# EAGLE board nano24rf-topo-thru (EAGLE 6.6.0)
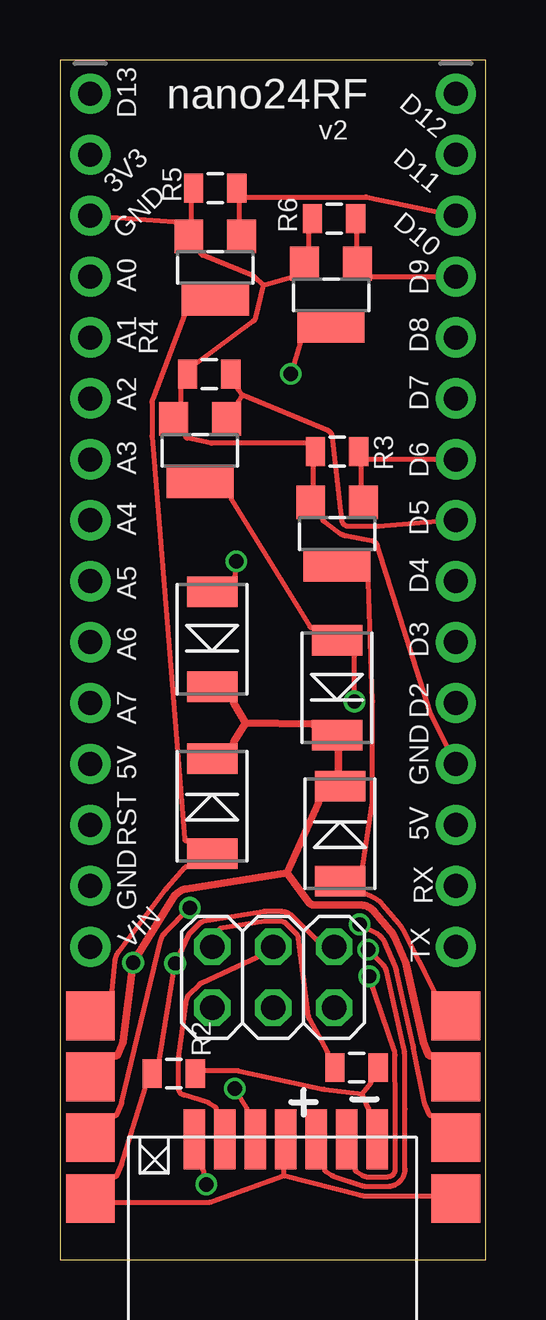
[diagram p0: board, top side]
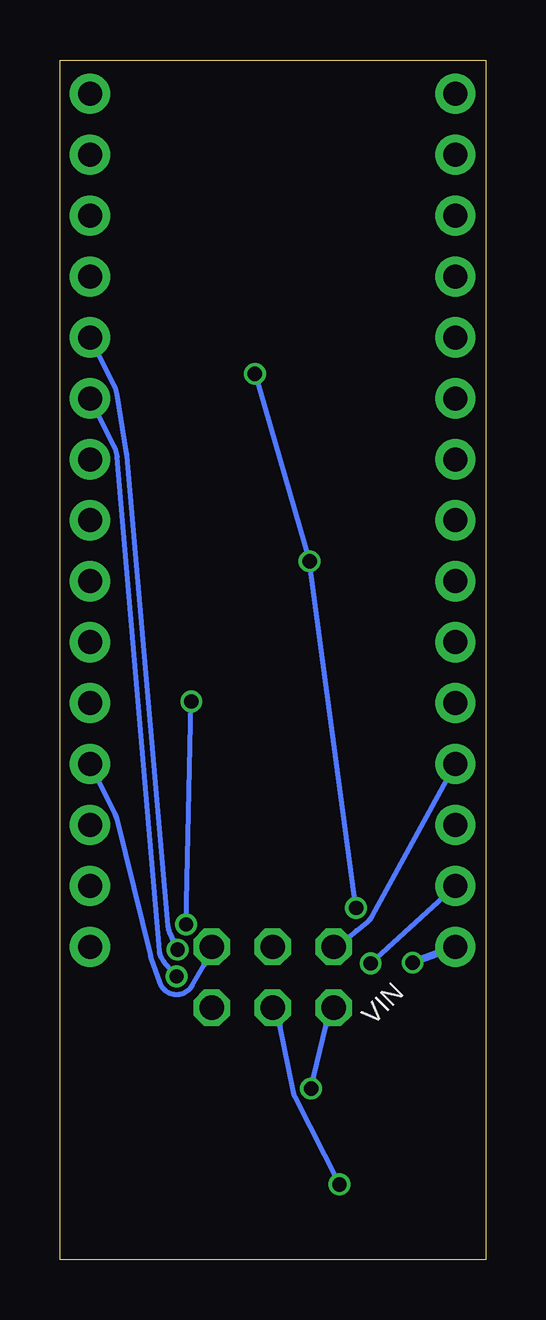
[diagram p1: board, bottom side, seen from below]

Size 17.76 x 50 mm. Coordinates in mm from the lower left corner, seen from the top.
Outline: 0,0 17.76,0 17.76,50 0,50 0,0
Copper layers (1*16): TOP 0.035mm / dielectric 1.5mm / BOTTOM 0.035mm
Design rules "Elecrow_2-layer_eagle_rule": minimum track width 6mil, minimum drill 12mil, track to track 6mil, track to pad 6mil, pad to pad 6mil, via to via 6mil, smd to smd 0mil, copper to edge 10mil, drill to drill 10mil, minimum pad ring 10mil, minimum via ring 6mil, stop-mask expansion 2mil, vias tented up to drill 100mil, thermal gap 10mil
Net classes: 0 default: width 0.178 mm, clearance 0.178 mm; 1 class_VIN: width 0.254 mm, clearance 0.178 mm to class 0, clearance 0.178 mm

## Footprints (pad centres in the part's own frame; a part is rotated, then mirrored left to right if it is on the bottom)
DO-214AC = smd 1.27 x 2.1: 1 -1.98,0; 2 1.98,0
1X15_ROUND_70 = drill 1 pad 1.676: 1 -17.78,0; 2 -15.24,0; 3 -12.7,0; 4 -10.16,0; 5 -7.62,0; 6 -5.08,0; 7 -2.54,0; 8 0,0; 9 2.54,0; 10 5.08,0; 11 7.62,0; 12 10.16,0; 13 12.7,0; 14 15.24,0; 15 17.78,0
2X03 = drill 1.016 pad 1.524 octagon: 1 -2.54,-1.27; 2 -2.54,1.27; 3 0,-1.27; 4 0,1.27; 5 2.54,-1.27; 6 2.54,1.27
SOT23-W = smd 1.2 x 1.4: 1 -1.1,-1.3; 2 1.1,-1.3 | smd 2.8 x 1.4: 3 0,1.3
0805 = smd 0.8 x 1.2: 1 -0.9,0; 2 0.9,0
FATPAD4 = smd 2.032 x 2.032: P$1 -3.81,0; P$2 -1.27,0; P$3 1.27,0; P$4 3.81,0
SMD1,27-2,54 = smd 0.9 x 2.5: 1 1.63,0.1; 2 2.9,0.1; 3 4.17,0.1; 4 5.44,0.1; 5 6.71,0.1; 6 7.98,0.1; 7 9.25,0.1

## Placement (x,y rotation side)
D1  [DO-214AC]  11.68,17.75 270 top
D2  [DO-214AC]  11.56,23.83 90 top
D3  [DO-214AC]  6.35,18.89 270 top
D4  [DO-214AC]  6.35,25.86 90 top
JP1  [1X15_ROUND_70]  1.27,30.81 270 top
JP2  [1X15_ROUND_70]  16.51,30.81 270 top
JP3  [2X03]  8.89,11.76 0 top
Q1  [SOT23-W]  11.56,30.26 180 top
Q2  [SOT23-W]  5.84,33.73 180 top
Q3  [SOT23-W]  6.48,41.35 180 top
Q4  [SOT23-W]  11.3,40.21 180 top
R1  [0805]  12.37,8 0 top
R2  [0805]  4.75,7.75 0 top
R3  [0805]  11.56,33.67 0 top
R4  [0805]  6.22,36.91 0 top
R5  [0805]  6.48,44.66 0 top
R6  [0805]  11.43,43.39 0 top
U$6  [FATPAD4]  1.27,6.35 270 top
U$7  [SMD1,27-2,54]  14.86,5.11 180 top
U$8  [FATPAD4]  16.51,6.35 270 top

## Library data of the parts
D1-D4 = dp_devices
JP1 JP2 = microbuilder
JP3 = pinhead
Q1-Q4 = adafruit
R1-R6 = ATTAMI-V0.00
U$6-U$8 = nano24rf

## Nets
3V3: JP1.2
5V: JP1.12 JP3.2 R1.1
CE: JP2.6 U$7.2
CSN: JP2.5 U$7.3
D3: JP2.10
D5: JP2.8 Q2.1 R4.2
D6: JP2.7 Q1.1 R3.2
D9: JP2.4 Q4.1 R6.2
D10: JP2.3 Q3.1 R5.2
FET01: D1.2 Q1.3 U$8.P$1
FET02: D2.2 Q2.3 U$8.P$3
FET03: D3.2 Q3.3 U$6.P$1
FET04: D4.2 Q4.3 U$6.P$3
GND: JP1.3 JP1.14 JP2.12 JP3.6 Q1.2 Q2.2 Q3.2 Q4.2 R2.1 R3.1 R4.1 R5.1 R6.1 U$6.P$4 U$7.4 U$8.P$4
MISO: JP3.1 U$7.5
MOSI: JP3.4 U$7.6
N$6: R1.2 R2.2 U$7.1
RST: JP3.5
SCK: JP3.3 U$7.7
SCL: JP1.9
SDA: JP1.8
VIN [class_VIN]: D1.1 D2.1 D3.1 D4.1 JP1.15 U$6.P$2 U$8.P$2

## Tracks (layer width: path | path; a pad name or v marks a point on that pad's centre or on a via)
5V
  TOP 0.203: R1.1 11.17,8.5 11.17,8.6 arc29 11.16,8.65 10.4,10.03 arc-21 10.37,10.14 9.95,13.39 arc38 9.87,13.56 9.42,14.01 arc45 9.21,14.1 8.57,14.1 arc9 8.53,14.1 6.68,13.8 arc36 6.67,13.79 6.67,13.69 JP3.2
  BOTTOM 0.203: JP3.2 5.77,13.39 5.7,13.46 5.41,13.69 arc1 5.4,13.7 4.94,14.06 arc-23 4.75,14.29 JP1.12
CE  (via drill 0.6 pad 0.9)
  TOP 0.203: U$7.2 12.31,3.86 12.31,3.76 arc57 12.35,3.68 12.61,3.51 arc33 12.78,3.46 13.68,3.46 arc90 13.98,3.76 13.98,6.26 13.97,8.5 arc2 13.97,8.51 13.97,8.62 arc16 13.95,8.7 v12.89,11.8
  BOTTOM 0.203: v12.89,11.8 13.43,12.43 arc36 13.61,12.86 15.37,33.45 arc-22 15.49,33.87 JP2.6
CSN  (via drill 0.6 pad 0.9)
  TOP 0.203: U$7.3 11.04,3.86 11.04,3.76 arc57 11.08,3.68 11.34,3.51 arc15 11.41,3.47 12.55,3.09 arc19 12.78,3.05 13.68,3.05 arc90 14.39,3.76 14.39,6.26 14.38,8.5 arc5 14.38,8.57 14.37,8.67 arc11 14.34,8.8 arc-4 14.32,8.88 13.63,11.97 arc32 13.43,12.34 v12.85,12.92
  BOTTOM 0.203: v12.85,12.92 13.19,13.66 arc19 13.25,13.9 14.97,33.49 arc-4 14.98,33.6 15.38,36.08 arc-18 15.49,36.41 JP2.5
D5
  TOP 0.203: JP2.8 13.28,30.55 arc-5 13.26,30.55 12.06,30.55 arc-84 11.75,30.82 11.36,34.3 arc61 11.17,34.55 7.65,36.01 arc10 7.6,36.02 | R4.2 7.42,36.41 7.42,36.31 arc35 7.44,36.25 7.6,36.02 | 7.6,36.02 7.46,35.79 arc32 7.44,35.73 7.44,35.63 Q2.1
D6
  TOP 0.203: JP2.7 12.86,33.35 12.76,33.35 R3.2 12.56,33.17 12.56,33.07 12.56,32.26 12.56,32.16 Q1.1
D9
  TOP 0.203: JP2.4 13,40.97 12.9,40.97 Q4.1 12.37,42.11 12.37,42.21 12.37,42.79 12.37,42.89 R6.2
D10
  TOP 0.203: Q3.1 7.48,43.25 7.48,43.35 7.48,44.06 7.48,44.16 R5.2 7.67,44.29 7.78,44.29 12.73,44.29 arc-12 12.79,44.28 JP2.3
FET01
  TOP 0.203: U$8.P$1 15.6,11.07 15.6,11.18 arc27 15.59,11.22 14.35,13.67 arc13 14.13,14 13.46,14.79 arc27 12.99,15.13 12.77,15.23 arc23 12.73,15.23 12.63,15.23 D1.2 12.63,16.3 12.63,16.4 arc-9 12.63,16.42 13.04,19.05 arc9 13.04,19.09 13.04,23.26 arc2 13.04,23.29 12.86,28.25 12.86,28.26 12.86,28.36 Q1.3
FET02  (via drill 0.6 pad 0.9)
  TOP 0.203: Q2.3 7.14,31.84 7.14,31.73 arc32 7.16,31.68 10.42,26.39 arc58 10.51,26.34 10.61,26.34 D2.2 12.28,25.27 12.28,25.17 v12.28,23.26 | U$8.P$3 15.6,5.99 15.49,5.99 arc-66 15.4,6.05 15.21,6.48 arc-12 15.2,6.54 14.75,8.81 arc5 14.72,8.91 arc-4 14.71,8.97 14.03,12.05 arc11 13.96,12.26 13.55,13.22 arc38 13.21,13.59 v12.5,13.97
  BOTTOM 0.203: v12.5,13.97 v12.28,23.26
FET03
  TOP 0.203: Q3.3 5.18,39.46 5.18,39.35 arc-21 5.17,39.32 3.86,35.84 arc21 3.84,35.73 3.84,34.33 arc5 3.84,34.31 5.2,17.54 arc85 5.3,17.44 5.4,17.44 D3.2 5.4,16.38 5.3,16.38 arc48 5.22,16.34 4.47,15.5 arc5 4.41,15.42 2.45,12.83 arc32 2.3,12.44 2.19,11.19 2.18,11.18 2.18,11.07 U$6.P$1
FET04  (via drill 0.6 pad 0.9)
  TOP 0.203: v7.35,29.1 7.3,28.48 7.3,28.37 D4.2 | U$6.P$3 2.18,5.99 2.29,5.99 arc66 2.38,6.05 2.56,6.48 arc10 2.58,6.53 4.2,13.28 arc-32 4.4,13.64 v5.41,14.66 | Q4.3 10.01,38.31 10.01,38.21 arc-16 10,38.18 v9.63,36.92
  BOTTOM 0.203: v5.41,14.66 v7.35,29.1 v9.63,36.92
GND  (via drill 0.6 pad 0.9)
  TOP 0.203: JP3.6 10.77,13.35 10.67,13.35 9.71,14.3 arc45 9.21,14.51 8.57,14.51 arc9 8.46,14.5 5.99,14.1 arc36 5.82,14.01 5.37,13.56 v4.8,12.34 4.15,8.36 arc9 4.14,8.35 4.14,8.24 R2.1 3.55,7.25 3.55,7.15 arc-17 3.54,7.12 2.58,3.97 arc-6 2.56,3.94 2.38,3.52 arc-66 2.29,3.45 2.18,3.45 U$6.P$4 2.18,2.38 6.1,2.38 arc20 6.36,2.42 9.33,3.48 | R5.1 5.48,44.16 5.48,43.25 Q3.2 | JP1.3 4.77,43.25 4.78,43.25 4.88,43.25 Q3.2 | U$8.P$4 15.6,2.64 12.78,2.64 arc-14 12.51,2.68 9.33,3.48 | U$7.4 9.33,3.86 9.33,3.48 | 8.49,40.59 8.17,39.28 arc-40 8.06,39.11 5.78,37.43 arc-36 5.72,37.41 5.62,37.41 R4.1 5.03,36.41 5.03,35.63 Q2.2 5.24,34.44 5.24,34.33 arc78 5.32,34.23 6.28,34.04 arc12 6.34,34.03 10.36,34.03 R3.1 10.56,33.17 10.56,32.16 Q1.2 10.96,30.96 10.96,30.86 arc52 10.99,30.78 11.62,30.29 arc27 11.93,30.16 13.01,29.96 arc-62 13.25,29.75 15.42,22.85 arc9 15.49,22.68 JP2.12 | 8.49,40.59 8.09,40.97 arc22 7.99,41.04 5.94,41.86 arc-68 5.88,41.95 5.88,42.06 Q3.2 | R6.1 10.37,42.89 10.37,42.11 Q4.2 9.71,40.91 9.6,40.91 arc17 9.57,40.91 8.49,40.59
  BOTTOM 0.203: JP2.12 15.49,18.63 arc13 15.4,18.39 13.98,12.64 arc-5 13.95,12.54 13.61,11.55 arc-131 12.24,11.42 11.75,12.27 11.75,12.37 JP3.6 | v4.8,12.34 JP1.14
MISO  (via drill 0.6 pad 0.9)
  TOP 0.203: U$7.5 7.8,6.16 7.8,6.26 arc32 7.79,6.31 v7.29,7.13
  BOTTOM 0.203: v7.29,7.13 6.67,9.73 6.67,9.83 JP3.1
MOSI
  TOP 0.203: U$7.6 6.53,6.16 6.53,6.26 arc57 6.49,6.35 6.23,6.52 arc16 6.15,6.55 5.16,6.86 arc-73 4.94,7.15 4.94,8.35 arc-8 4.95,8.39 5.29,10.85 arc-37 5.37,11.02 5.82,11.47 arc-20 5.91,11.53 8.24,12.61 8.31,12.68 JP3.4
N$6
  TOP 0.203: R1.2 12.97,7.5 12.97,7.4 arc-39 12.95,7.34 12.6,6.91 | R2.2 5.95,7.88 6.05,7.88 7.29,7.88 arc-12 7.45,7.87 11,7.1 arc5 11.03,7.1 12.6,6.91 | U$7.1 12.88,6.16 12.88,6.26 arc24 12.87,6.3 12.6,6.91
SCK  (via drill 0.6 pad 0.9)
  TOP 0.203: U$7.7 5.96,3.86 5.96,3.76 arc13 5.96,3.74 v6.1,3.13
  BOTTOM 0.203: v6.1,3.13 7.96,6.78 arc16 8.03,6.98 8.57,9.73 8.57,9.83 JP3.3
VIN  (via drill 0.6 pad 0.9)
  TOP 0.305: 9.48,16.11 10.77,19.03 arc24 10.79,19.09 10.79,19.25 D1.1 11.62,20.21 11.62,20.36 11.62,21.21 11.62,21.36 D2.1 10.66,22.33 10.51,22.33 7.75,22.36 | D3.1 7.25,21.35 7.25,21.51 arc-32 7.27,21.59 7.75,22.36 | 9.48,16.11 5.29,15.46 arc49 4.73,15.08 v3.05,12.38 2.64,9.1 arc-16 2.61,9 2.43,8.57 arc-66 2.29,8.48 2.13,8.48 U$6.P$2 | U$8.P$2 15.65,8.48 15.49,8.48 arc-67 15.35,8.58 15.17,9.01 arc-11 15.15,9.07 14.48,12.15 arc11 14.38,12.45 13.97,13.4 arc17 13.78,13.71 13.11,14.49 arc50 12.5,14.78 11.99,14.78 | 11.99,14.78 | 11.99,14.78 10.63,14.78 arc-54 10.35,14.92 9.48,16.11 | 7.75,22.36 7.27,23.17 arc-31 7.25,23.25 7.25,23.4 D4.1
  BOTTOM 0.305: v3.05,12.38 JP1.15

## Text on the board
tPlace: D13 | nano24RF | v2 | D12 | D11 | 3V3 | GND | D10 | A0 | D9 | A1 | D8 | A2 | D7 | A3 | D6 | A4 | D5 | A5 | D4 | A6 | D3 | D2 | A7 | 5V | GND | RST | 5V | GND | VIN | RX | TX
bPlace: VIN